# EAGLE board ferrofluide_COUAPEL (EAGLE 7.6.0)
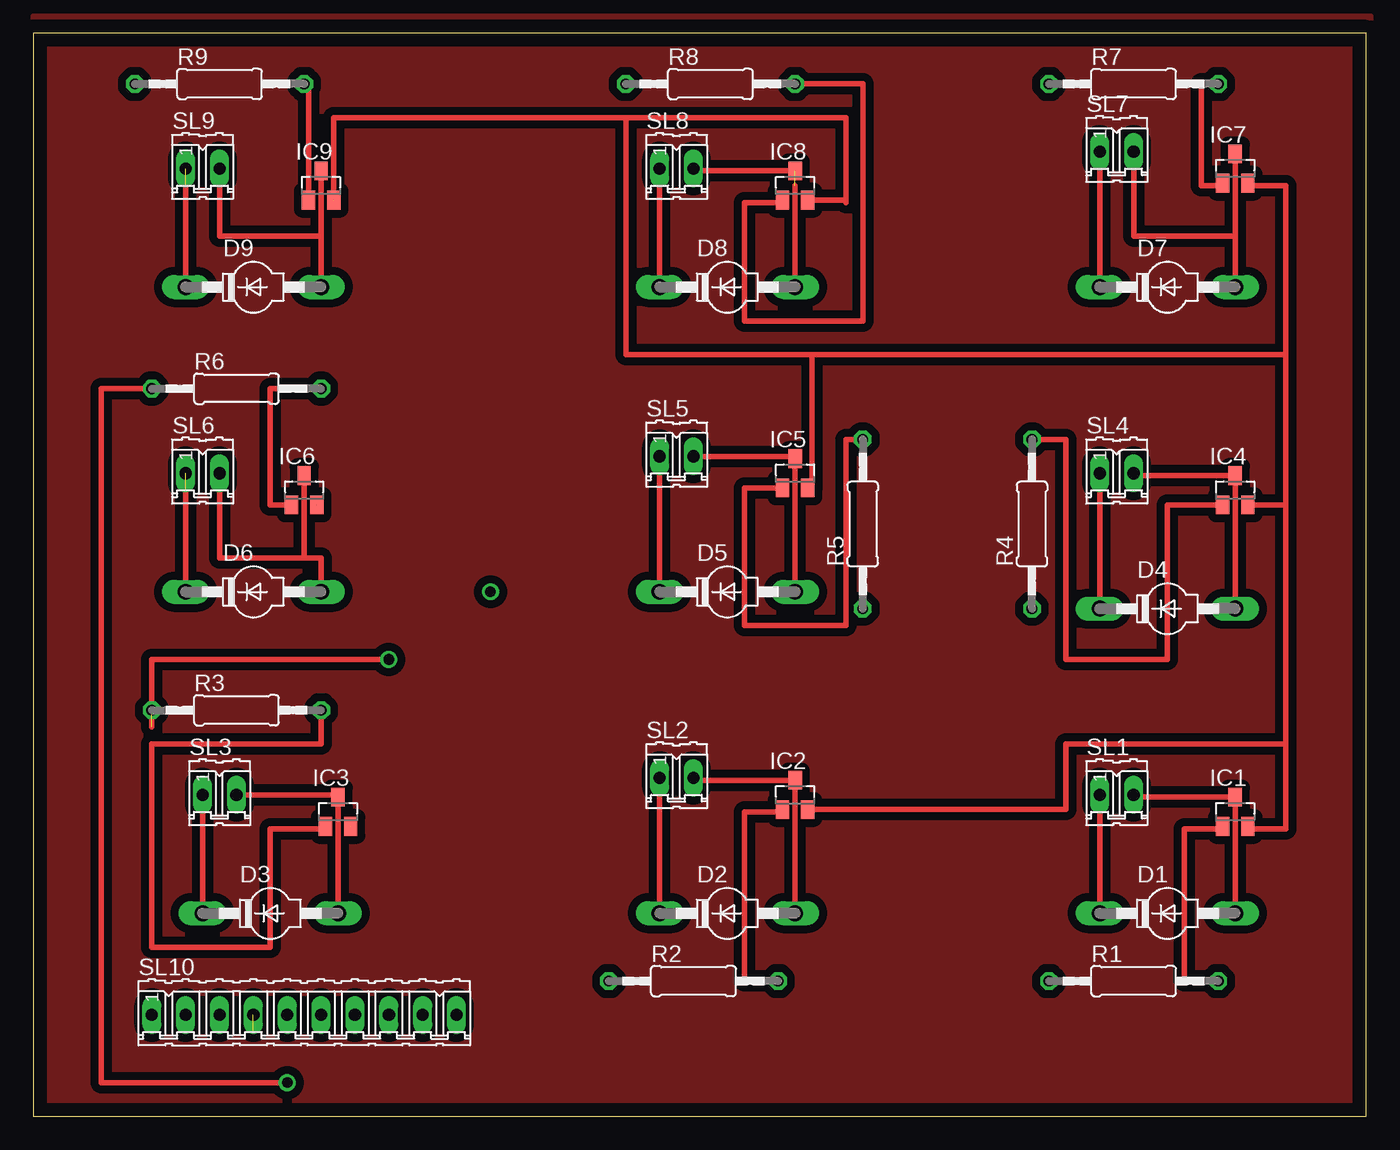
[diagram p0: board, top side]
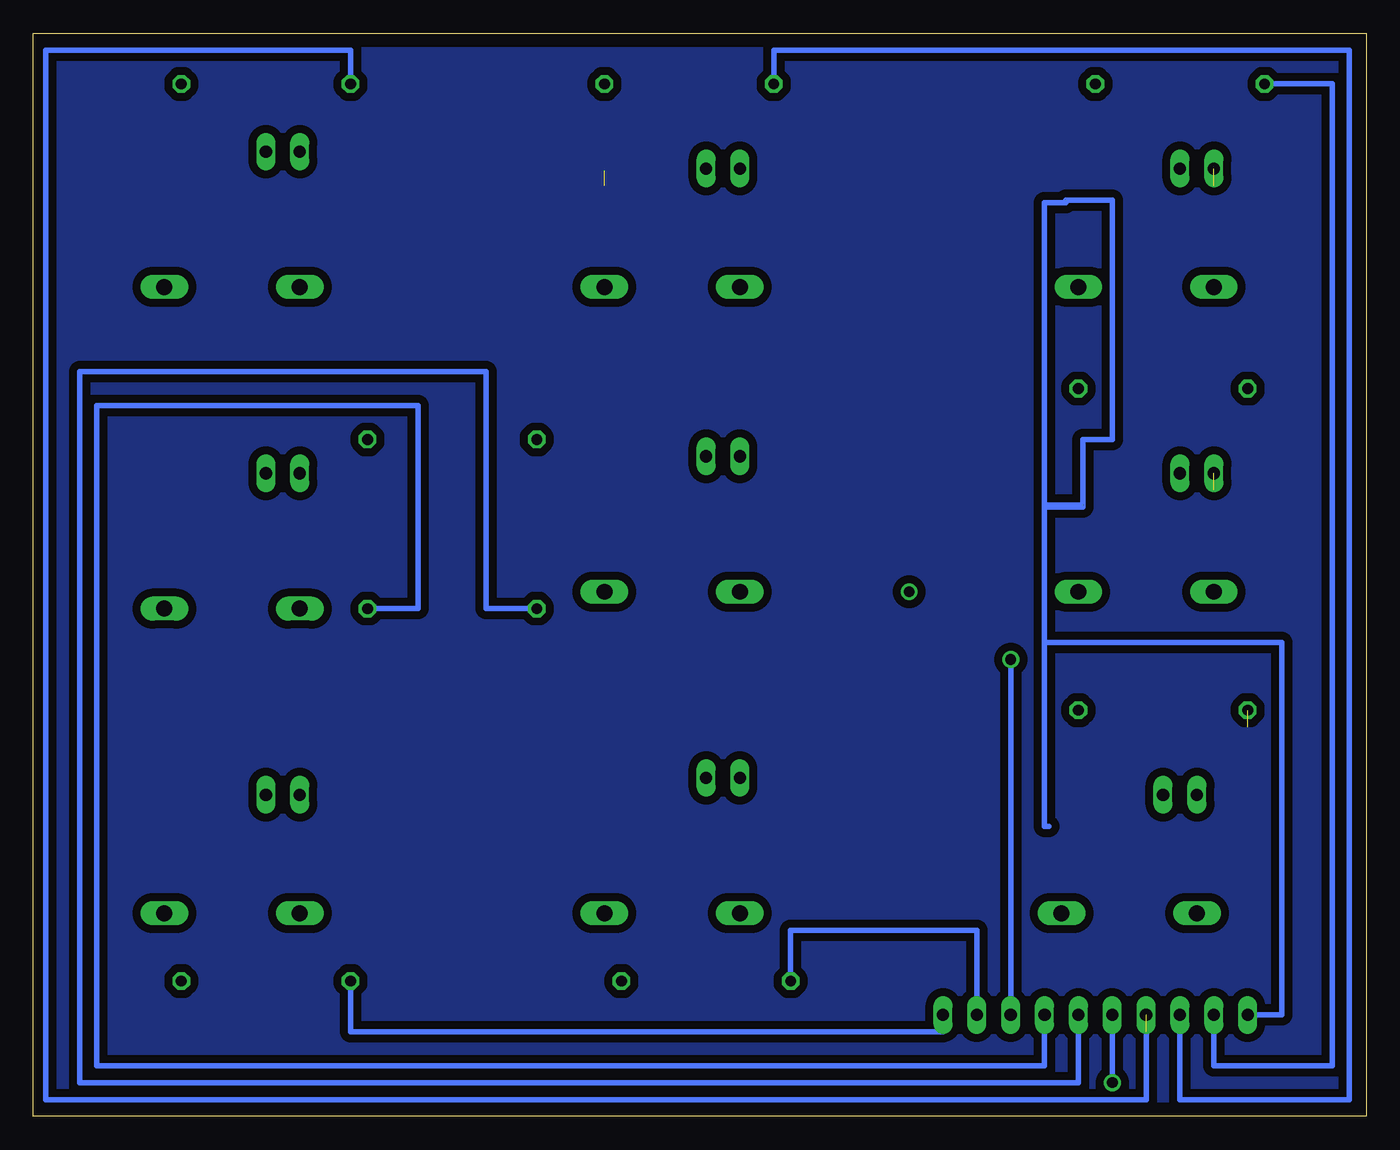
[diagram p1: board, bottom side, seen from below]

Size 100 x 81.27 mm. Coordinates in mm from the lower left corner, seen from the top.
Outline: 0,0 100,0 100,81.27 0,81.27 0,0
Copper layers (1*16): Top 0.035mm / dielectric 1.5mm / Bottom 0.035mm
Design rules "default": minimum track width 10mil, minimum drill 24mil, track to track 8mil, track to pad 8mil, pad to pad 8mil, via to via 8mil, smd to smd 8mil, copper to edge 40mil, drill to drill 8mil, minimum pad ring 10mil, minimum via ring 8mil, stop-mask expansion 4mil, vias tented up to drill 0mil, thermal gap 10mil

## Footprints (pad centres in the part's own frame; a part is rotated, then mirrored left to right if it is on the bottom)
SOD57-10 = drill 1.194 long: A 5.08,0; C -5.08,0
SOT23 = smd 1 x 1.4: 1 -0.95,-1.1; 2 0.95,-1.1; 3 0,1.1
0207/12 = drill 0.813 octagon: 1 -6.35,0; 2 6.35,0
02P = drill 0.914 long: 1 -1.27,0; 2 1.27,0
10P = drill 0.914 long: 1 -11.43,0; 2 -8.89,0; 3 -6.35,0; 4 -3.81,0; 5 -1.27,0; 6 1.27,0; 7 3.81,0; 8 6.35,0; 9 8.89,0; 10 11.43,0

## Placement (x,y rotation side)
D1  1N5061  [SOD57-10]  85.09,15.24 0 top
D2  1N5061  [SOD57-10]  52.07,15.24 0 top
D3  1N5061  [SOD57-10]  17.78,15.24 0 top
D4  1N5061  [SOD57-10]  85.09,38.1 0 top
D5  1N5061  [SOD57-10]  52.07,39.37 0 top
D6  1N5061  [SOD57-10]  16.51,39.37 0 top
D7  1N5061  [SOD57-10]  85.09,62.23 0 top
D8  1N5061  [SOD57-10]  52.07,62.23 0 top
D9  1N5061  [SOD57-10]  16.51,62.23 0 top
IC1  SI2300DS  [SOT23]  90.17,22.86 0 top
IC2  SI2300DS  [SOT23]  57.15,24.13 0 top
IC3  SI2300DS  [SOT23]  22.86,22.86 0 top
IC4  SI2300DS  [SOT23]  90.17,46.99 0 top
IC5  SI2300DS  [SOT23]  57.15,48.26 0 top
IC6  SI2300DS  [SOT23]  20.32,46.99 0 top
IC7  SI2300DS  [SOT23]  90.17,71.12 0 top
IC8  SI2300DS  [SOT23]  57.15,69.85 0 top
IC9  SI2300DS  [SOT23]  21.59,69.85 0 top
R1  [0207/12]  82.55,10.16 0 top
R2  [0207/12]  49.53,10.16 0 top
R3  [0207/12]  15.24,30.48 0 top
R4  [0207/12]  74.93,44.45 90 top
R5  [0207/12]  62.23,44.45 90 top
R6  [0207/12]  15.24,54.61 0 top
R7  [0207/12]  82.55,77.47 0 top
R8  [0207/12]  50.8,77.47 0 top
R9  [0207/12]  13.97,77.47 0 top
SL1  [02P]  81.28,24.13 0 top
SL2  [02P]  48.26,25.4 0 top
SL3  [02P]  13.97,24.13 0 top
SL4  [02P]  81.28,48.26 0 top
SL5  [02P]  48.26,49.53 0 top
SL6  [02P]  12.7,48.26 0 top
SL7  [02P]  81.28,72.39 0 top
SL8  [02P]  48.26,71.12 0 top
SL9  [02P]  12.7,71.12 0 top
SL10  [10P]  20.32,7.62 0 top

## Library data of the parts
D1-D9 = diode
IC1-IC9 = linear-eleves
R1-R9 = resistor
SL1-SL10 = con-amp-quick; OC_FARNELL: unknown; OC_NEWARK: unknown

## Nets
GND: IC1.2 IC2.2 IC3.2 IC4.2 IC5.2 IC6.2 IC7.2 IC8.2 IC9.2 SL10.1
N$1: D1.C SL1.1
N$2: D1.A IC1.3 SL1.2
N$3: IC1.1 R1.2
N$4: D2.C SL2.1
N$5: D2.A IC2.3 SL2.2
N$6: IC2.1 R2.2
N$7: D4.C SL4.1
N$8: D4.A IC4.3 SL4.2
N$9: IC4.1 R4.2
N$10: D6.C SL6.1
N$11: D6.A IC6.3 SL6.2
N$12: IC6.1 R6.2
N$13: D8.C SL8.1
N$14: D8.A IC8.3 SL8.2
N$15: IC8.1 R8.2
N$16: R9.1 SL10.2
N$17: D9.C SL9.1
N$18: D9.A IC9.3 SL9.2
N$19: D7.C SL7.1
N$20: IC9.1 R9.2
N$21: R8.1 SL10.3
N$22: D7.A IC7.3 SL7.2
N$23: IC7.1 R7.2
N$24: D5.C SL5.1
N$25: D5.A IC5.3 SL5.2
N$26: IC5.1 R5.2
N$27: D3.C SL3.1
N$28: D3.A IC3.3 SL3.2
N$29: IC3.1 R3.2
N$30: R7.1 SL10.4
N$31: R6.1 SL10.5
N$32: R5.1 SL10.6
N$33: R4.1 SL10.7
N$34: R3.1 SL10.8
N$35: R2.1 SL10.9
N$36: R1.1 SL10.10

## Tracks (layer width: path | path; a pad name or v marks a point on that pad's centre or on a via)
GND  (3 unrouted)
  Top 0.406: IC2.2 77.47,23.03 77.47,27.94 93.98,27.94 | 93.98,27.94 93.98,21.59 91.12,21.59 IC1.2 | 93.98,45.89 93.98,27.94 | IC4.2 93.98,45.89 | 93.98,45.89 93.98,57.15 | 93.98,57.15 93.98,69.85 91.12,69.85 IC7.2 | IC8.2 60.96,68.75 | 60.96,68.75 60.96,68.58 | 60.96,68.75 60.96,74.93 44.45,74.93 | 44.45,74.93 22.54,74.93 IC9.2 | 58.42,57.15 44.45,57.15 44.45,74.93 | IC5.2 58.42,47.16 58.42,57.15 | 58.42,57.15 93.98,57.15
  Bottom 0.406: IC3.2 24.13,21.76 24.13,35.56 | 24.13,35.56 24.13,45.72 21.27,45.72 IC6.2 | IC6.2 24.13,45.89 24.13,68.58 22.54,68.58 IC9.2 19.05,68.75 19.05,50.8 21.27,50.8 IC6.2 | SL10.1 6.35,7.62 6.35,35.56 24.13,35.56
GND1
  pour Bottom (isolate 0.6): 0,81.28 100.33,80.01 100.33,0 0,0
N$1
  Top 0.406: D1.C SL1.1
N$2
  Top 0.406: D1.A IC1.3 82.55,23.96 SL1.2
N$3
  Top 0.406: R1.2 86.36,10.16 86.36,21.59 89.22,21.59 IC1.1
N$4
  Top 0.406: D2.C SL2.1
N$5
  Top 0.406: D2.A IC2.3 49.53,25.23 SL2.2
N$6
  Top 0.406: R2.2 53.34,10.16 53.34,22.86 56.2,22.86 IC2.1
N$7
  Top 0.406: D4.C SL4.1
N$8
  Top 0.406: D4.A IC4.3 82.55,48.09 SL4.2
N$9
  Top 0.406: IC4.1 85.09,45.89 85.09,34.29 77.47,34.29 77.47,50.8 R4.2
N$10  (1 unrouted)
  Top 0.406: D6.C 11.43,46.99
N$11
  Top 0.406: D6.A 21.59,41.91 20.32,41.91 | 20.32,41.91 13.97,41.91 SL6.2 | IC6.3 20.32,41.91
N$12
  Top 0.406: IC6.1 17.78,45.89 17.78,54.61 R6.2
N$13
  Top 0.406: D8.C SL8.1
N$14  (1 unrouted)
  Top 0.406: IC8.3 49.53,70.95 SL8.2 | D8.A 57.15,69.85
N$15
  Top 0.406: R8.2 62.23,77.47 62.23,59.69 53.34,59.69 53.34,68.58 56.2,68.58 IC8.1
N$16
  Bottom 0.406: SL10.2 11.43,3.81 2.54,3.81 2.54,77.47 R9.1
N$17  (1 unrouted)
  Top 0.406: D9.C 11.43,69.85
N$18
  Top 0.406: D9.A 21.59,66.04 | 21.59,66.04 IC9.3 | SL9.2 13.97,66.04 21.59,66.04
N$19
  Top 0.406: D7.C SL7.1
N$20
  Top 0.406: R9.2 20.64,77.47 IC9.1
N$21
  Bottom 0.406: SL10.3 13.97,1.27 1.27,1.27 1.27,80.01 44.45,80.01 R8.1
N$22
  Top 0.406: D7.A 90.17,66.04 | 90.17,66.04 82.55,66.04 SL7.2 | IC7.3 90.17,66.04
N$23
  Top 0.406: R7.2 87.63,77.47 87.63,69.85 89.22,69.85 IC7.1
N$24
  Top 0.406: D5.C SL5.1
N$25
  Top 0.406: D5.A IC5.3 57.15,49.53 SL5.2
N$26
  Top 0.406: IC5.1 53.34,47.16 53.34,36.83 60.96,36.83 60.96,50.8 R5.2
N$27
  Top 0.406: SL3.1 D3.C
N$28
  Top 0.406: D3.A IC3.3 22.86,24.13 SL3.2
N$29
  Top 0.406: R3.2 21.59,27.94 8.89,27.94 8.89,12.7 17.78,12.7 17.78,21.59 21.91,21.59 IC3.1
N$30  (1 unrouted)
  Bottom 0.406: R7.1 76.2,80.01 99.06,80.01 99.06,1.27 16.51,1.27 16.51,6.35
N$31  (via drill 0.8 pad 1.27)
  Top 0.406: v19.05,2.54 5.08,2.54 5.08,54.61 R6.1
  Bottom 0.406: SL10.5 v19.05,2.54
N$32
  Bottom 0.406: SL10.6 21.59,2.54 96.52,2.54 96.52,55.88 66.04,55.88 66.04,38.1 R5.1
N$33
  Bottom 0.406: SL10.7 24.13,3.81 95.25,3.81 95.25,53.34 71.12,53.34 71.12,38.1 R4.1
N$34  (via drill 0.8 pad 1.27)  (1 unrouted)
  Top 0.406: v26.67,34.29 8.89,34.29 8.89,29.21
  Bottom 0.406: SL10.8 v26.67,34.29
N$35
  Bottom 0.406: R2.1 43.18,13.97 29.21,13.97 SL10.9
N$36
  Bottom 0.406: R1.1 76.2,6.35 31.75,6.35 SL10.10
N$37  (via drill 0.8 pad 1.27)
  other vias: 34.29,39.37
N$38
  pour Top (isolate 0.6): 0,82.55 100.33,82.55 100.33,0 0,0
N$39
  pour Bottom (isolate 0.61): 0,81.28 100.33,81.28 100.33,78.74 100.33,0 0,0